# EAGLE board opengeiger_board (EAGLE 6.5.0)
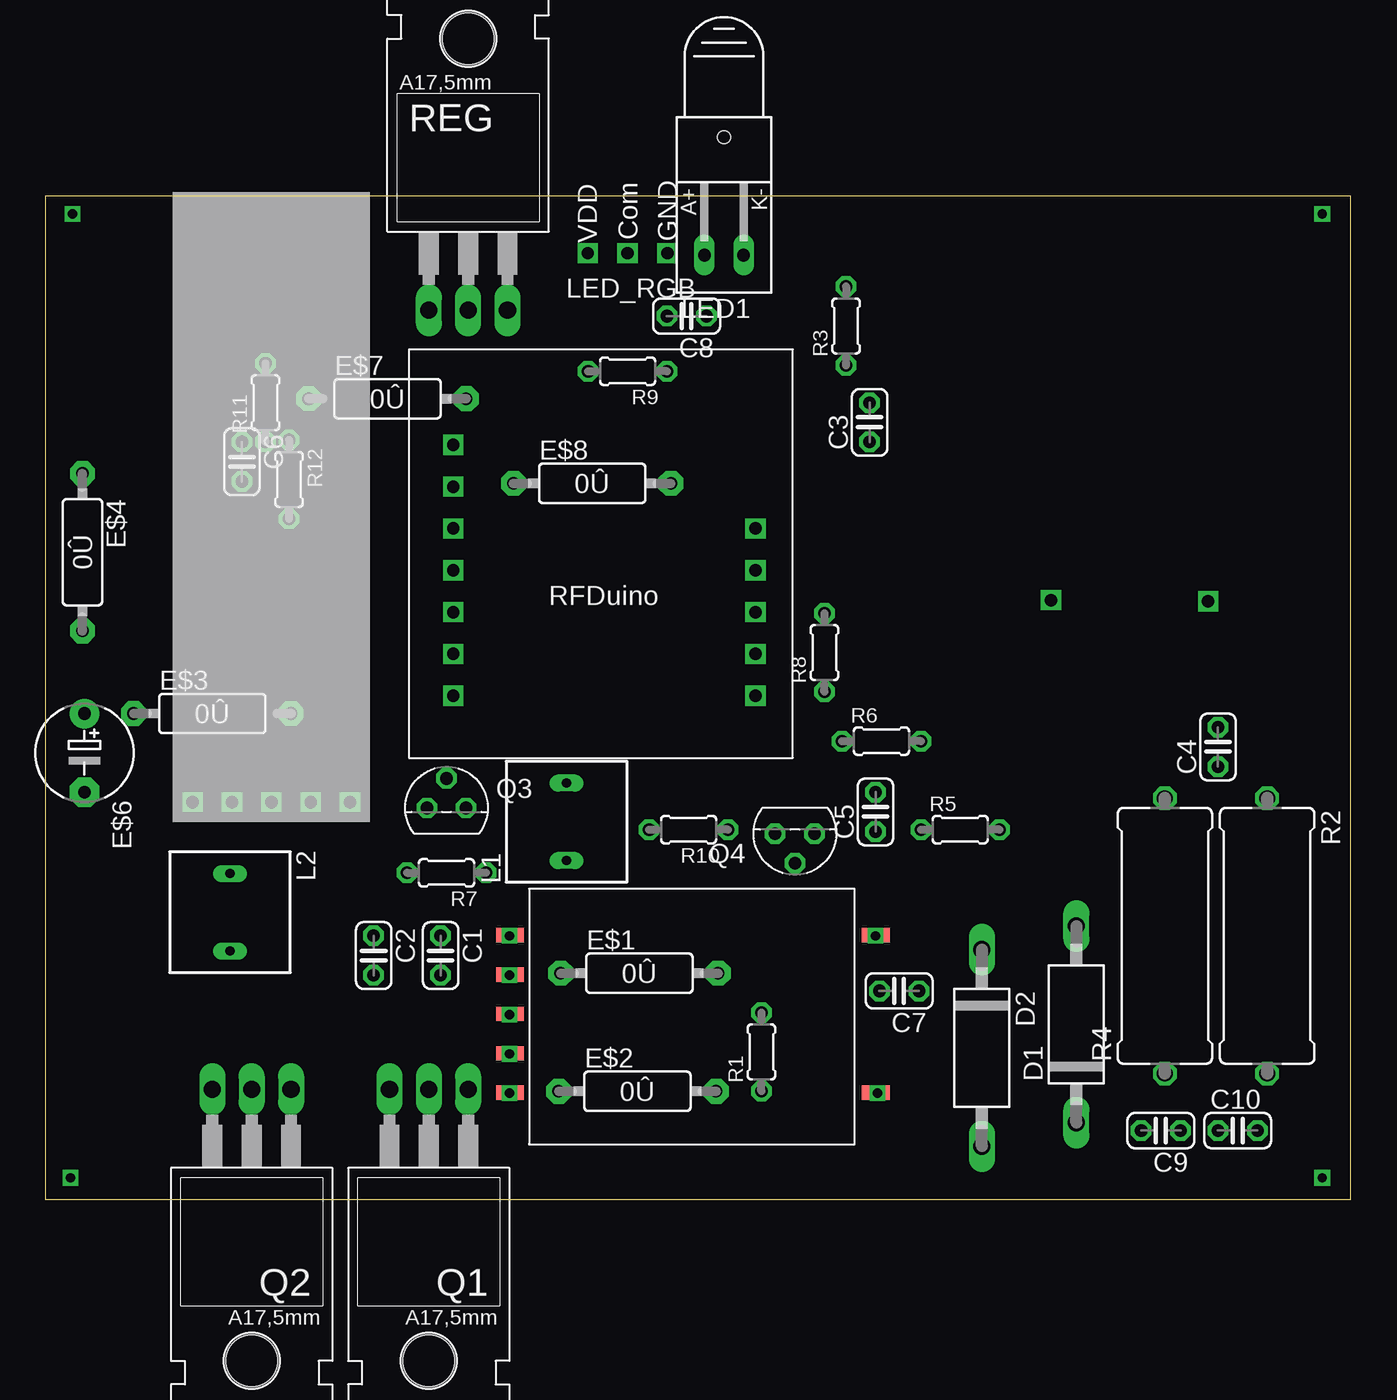
[diagram p0: board, top side]
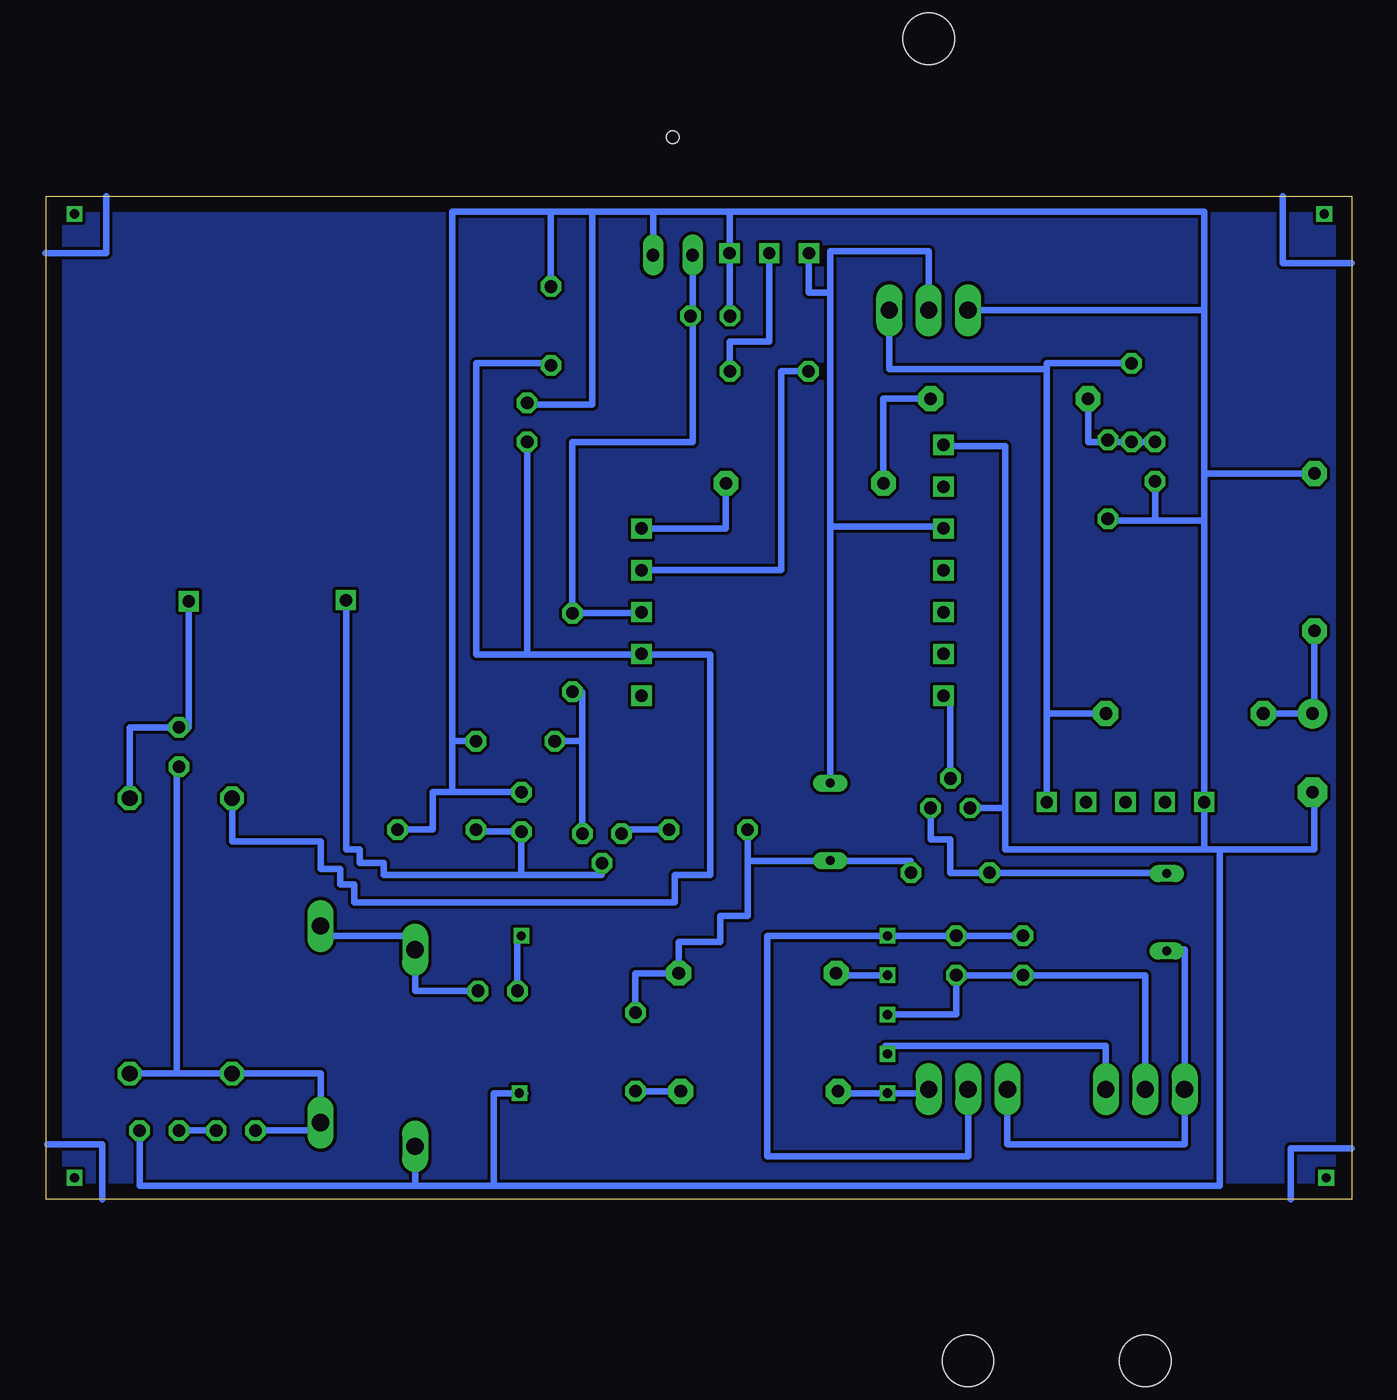
[diagram p1: board, bottom side, seen from below]

Size 84.25 x 64.76 mm. Coordinates in mm from the lower left corner, seen from the top.
Outline: 0,0 84.25,0 84.25,64.76 0,64.76 0,0
Copper layers (1*16): Top 0.035mm / dielectric 1.5mm / Bottom 0.035mm
Design rules "default": minimum track width 10mil, minimum drill 24mil, track to track 8mil, track to pad 8mil, pad to pad 8mil, via to via 8mil, smd to smd 8mil, copper to edge 40mil, drill to drill 8mil, minimum pad ring 10mil, minimum via ring 8mil, stop-mask expansion 4mil, vias tented up to drill 0mil, thermal gap 10mil

## Footprints (pad centres in the part's own frame; a part is rotated, then mirrored left to right if it is on the bottom)
C025-024X044 = drill 0.813 octagon: 1 -1.27,0; 2 1.27,0
DO15-12 = drill 1.118 long: A 6.35,0; C -6.35,0
0R/10 = drill 0.813 pad 1.6 octagon: 1 -5.08,0; 2 5.08,0
E5-6 = drill 0.813 pad 1.905: + -2.54,0 | drill 0.813 pad 1.905 octagon: - 2.54,0
SD8 = drill 0.6 long: 1 -2.5,0; 2 2.5,0
Q62902-B155 = drill 0.813 long: A 7.62,-1.27; K 7.62,1.27 | hole 0.813: 0,0
TO220 = drill 1.118 long: 1 -2.54,-6.35; 2 0,-6.35; 3 2.54,-6.35 | hole 3.302: 0,11.176
TO92 = drill 0.813 octagon: 1 1.27,0; 2 0,1.905; 3 -1.27,0
0204/5 = drill 0.813 octagon: 1 -2.54,0; 2 2.54,0
0617/17 = drill 1.016 octagon: 1 -8.89,0; 2 8.89,0
CCFL_TRANSFO = smd 1.778 x 0.914: P$1 -1.238,13.5; P$2 -1.238,10.96; P$3 -1.238,8.42; P$4 -1.238,5.88; P$5 -1.238,3.34; P$6 22.365,3.34; P$10 22.365,13.5
RFDUINO = drill 0.8 square: +3V 2.85,-11.55; FACTORY 2.85,-16.95; GND 2.85,-6.15; GPIO0/AREF 2.85,-19.65; GPIO1 2.85,-22.35; GPIO2 22.35,-22.35; GPIO3 22.35,-19.65; GPIO4 22.35,-16.95; GPIO5 22.35,-14.25; GPIO6 22.35,-11.55; P2 2.85,-8.85; RESET 2.85,-14.25
TUBE = drill 0.8 square: P$1 0,0; P$2 10.14,-0.08
LED_RGB = drill 0.8 square: COM 0,0; GND 0,2.57; VDD 0,-2.57
CHARGEUR = drill 0.8 square: P$1 0,0; P$2 0,-2.54; P$3 0,-5.08; P$4 0,-7.62; P$5 0,-10.16

## Placement (x,y rotation side)
C1  100n  [C025-024X044]  25.53,15.75 270 top
C2  100n  [C025-024X044]  21.21,15.75 270 top
C3  100n  [C025-024X044]  53.21,50.17 90 top
C4  10n  [C025-024X044]  75.69,29.21 90 top
C5  100n  [C025-024X044]  53.59,25.02 90 top
C6  100n  [C025-024X044]  12.7,47.62 270 top
C7  47n  [C025-024X044]  55.12,13.46 180 top
C8  100n  [C025-024X044]  41.4,57.02 180 top
C9  47n  [C025-024X044]  72.01,4.45 180 top
C10  100n  [C025-024X044]  76.96,4.45 0 top
D1  1N5060GP  [DO15-12]  66.55,11.3 90 top
D2  1N5060GP  [DO15-12]  60.45,9.78 270 top
E$1  [0R/10]  38.35,14.61 0 top
E$2  [0R/10]  38.23,6.98 0 top
E$3  [0R/10]  10.8,31.37 0 top
E$4  [0R/10]  2.41,41.78 270 top
E$6  [E5-6]  2.54,28.83 270 top
E$7  [0R/10]  22.1,51.69 0 top
E$8  [0R/10]  35.31,46.23 0 top
L1  100u  [SD8]  33.66,24.38 90 top
L2  100u  [SD8]  11.94,18.54 270 top
LED1  [Q62902-B155]  43.81,68.58 270 top
Q1  BU505  [TO220]  24.77,0.76 180 top
Q2  BU505  [TO220]  13.34,0.76 180 top
Q3  BC337  [TO92]  25.91,25.27 0 top
Q4  BC337  [TO92]  48.39,23.62 180 top
R1  330  [0204/5]  46.23,9.53 90 top
R2  4.7M  [0617/17]  78.87,17.02 270 top
R3  27k  [0204/5]  51.69,56.39 90 top
R4  4.7M  [0617/17]  72.26,17.02 90 top
R5  490k  [0204/5]  59.06,23.88 0 top
R6  10k  [0204/5]  53.98,29.59 0 top
R7  1k  [0204/5]  25.91,21.08 180 top
R8  330  [0204/5]  50.29,35.31 90 top
R9  1k  [0204/5]  37.59,53.47 180 top
R10  330  [0204/5]  41.53,23.88 180 top
R11  10k  [0204/5]  14.22,51.44 90 top
R12  33k  [0204/5]  15.75,46.48 270 top
REG  [TO220]  27.3,63.75 0 top
U$1  CCFL_TRANSFO  [CCFL_TRANSFO]  31.24,3.56 0 top
U$2  RFDUINO  [RFDUINO]  23.5,54.86 0 top
U$3  TUBE  [TUBE]  75.06,38.61 180 top
U$4  LED_RBG  [LED_RGB]  37.59,61.09 270 top
U$5  CHARGEUR  [CHARGEUR]  9.53,25.65 90 top

## Library data of the parts
C1-C10 E$6 R1-R12 = rcl
D1 D2 = diode
E$1-E$4 E$7 E$8 = jumper
L1 L2 = inductor-neosid; OC_FARNELL: unknown; OC_NEWARK: unknown
LED1 = led
Q1-Q4 REG = transistor
U$1-U$5 = CCFL

## Nets
N$1: Q1.3 Q2.3
N$2: C3.2 C5.2 C8.2 C10.2 E$4.1 LED1.K Q3.3 R5.2 R6.2 REG.1 U$5.P$1
N$5: Q3.2
N$6: C1.2 C2.2
N$8: C9.2 D1.C R2.2 R4.1
N$9: Q2.1
N$11: R9.2
N$13: R10.1
N$14: C5.1 Q4.2 R5.1
N$15: Q4.3 R8.1
N$17: E$3.2 R11.2 REG.3 U$5.P$5
N$18: C3.1 R3.1
N$19: LED1.A R8.2
N$20: Q3.1 R7.2
N$21: Q1.2
S$1: E$2.1
S$2: E$1.1
S$3: L2.1
S$4: U$1.P$6
S$5: E$2.2 R1.1
S$6: R6.1
S$7: L1.1
S$8: C4.2 U$3.P$1
S$10: C7.2
S$11: C7.1
S$13: U$4.VDD
S$14: R9.1
S$26: C6.1
S$27: E$7.2
VDD: REG.2
VDD_BOBINE: E$1.2 R7.1 R10.2

## Tracks (layer width: path | path; a pad name or v marks a point on that pad's centre or on a via)
N$1
  Bottom 0.406: Q1.3 22.23,3.56 10.8,3.56 Q2.3 10.8,16.13 12.57,16.13
N$2  (via drill 0.6)
  Bottom 0.406: 9.53,43.81 U$5.P$1 9.53,22.61 | 9.53,43.81 9.53,46.86 | 9.53,46.86 9.53,57.4 | 9.53,57.4 REG.1 | 22.35,25.27 22.35,48.64 26.42,48.64 | 22.35,25.27 22.35,22.61 9.53,22.61 | 49.02,63.75 45.09,63.75 | 45.09,63.75 40.13,63.75 | 40.13,63.75 9.53,63.75 9.53,57.4 | Q3.3 22.35,25.27 | 8.51,22.61 8.51,0.89 55.37,0.89 | 9.53,22.61 8.51,22.61 | 55.37,0.89 60.45,0.89 | 53.34,6.86 v53.72,6.86 55.37,6.86 55.37,0.89 | 49.02,63.75 49.02,51.31 53.21,51.31 C3.2 | 60.45,0.89 60.45,4.32 | 49.02,63.75 51.69,63.75 | 51.69,63.75 51.69,58.8 | 51.69,63.75 58.04,63.75 58.04,29.59 | 58.04,29.59 58.04,26.29 | 58.04,26.29 C5.2 53.59,26.16 | 58.04,26.29 59.31,26.29 59.31,23.88 R5.2 | R6.2 58.04,29.59 | 8.51,22.61 2.41,22.61 2.41,26.29 | E$4.1 9.53,46.86 | 60.45,0.89 78.23,0.89 C10.2 | C8.2 40.13,63.75 | LED1.K 45.09,63.75 | 12.7,46.48 12.7,43.81 | 12.7,43.81 15.75,43.81 15.75,44.07 | 12.7,43.81 9.53,43.81
N$5
  Bottom 0.406: Q3.2 25.91,32.51 26.29,32.51
N$6  (via drill 0.6)
  Bottom 0.406: 30.1,11.94 v29.97,11.94 25.53,11.94 C1.2 C2.2 13.34,14.48 13.34,6.98
N$8
  Bottom 0.406: 75.82,8.13 R4.1 66.55,8.13 D1.C 66.55,4.45 C9.2 | 75.82,8.13 R2.2 | 75.82,27.94 75.82,8.13
N$9
  Bottom 0.406: Q2.1 15.88,9.91 30.1,9.91 30.1,9.4
N$11
  Bottom 0.406: 45.85,40.64 36.83,40.64 36.83,53.47 R9.2
N$12
  Bottom 0.406: 64.39,19.18 64.39,20.32 65.28,20.32 65.28,21.34 66.55,21.34 66.55,23.11 72.26,23.11 72.26,26.04
N$13
  Bottom 0.406: R10.1 47.12,23.88 47.12,23.49
N$14
  Bottom 0.406: 53.59,20.95 48.39,20.95 Q4.2 | 53.59,20.95 C5.1 56.52,23.75 R5.1 | 53.59,20.95 62.48,20.95 62.48,21.72 64.01,21.72 64.01,22.61 64.9,22.61 64.9,38.61
N$15
  Bottom 0.406: R8.1 49.66,32.77 49.66,29.59 | 49.66,29.59 Q4.3 | 51.56,29.59 49.66,29.59
N$17
  Bottom 0.406: U$5.P$5 19.69,31.37 | 19.69,31.37 19.69,53.47 19.69,53.59 | 19.69,53.59 29.84,53.59 REG.3 | E$3.2 19.69,31.37 | R11.2 19.69,53.97 19.69,53.59
N$18
  Bottom 0.406: 53.21,35.18 41.4,35.18 41.4,20.95 43.69,20.95 43.69,19.18 64.26,19.18 | 53.21,35.18 C3.1 | 53.21,35.18 56.52,35.18 56.52,53.97 51.69,53.97 R3.1
N$19
  Bottom 0.406: 45.85,37.85 R8.2 50.29,48.9 42.55,48.9 LED1.A
N$20
  Bottom 0.406: 11.94,21.08 R7.2 25.91,21.08 25.91,23.24 27.18,23.24 Q3.1
N$21  (via drill 0.6)
  Bottom 0.406: 21.08,17.02 v29.97,17.02 37.72,17.02 37.72,2.79 24.77,2.79 Q1.2
S$1  (via drill 0.6)
  Bottom 0.406: 27.3,6.86 v29.97,6.86 33.15,6.86 E$2.1
S$2  (via drill 0.6)
  Bottom 0.406: v29.97,14.48 33.27,14.48 E$1.1
S$5
  Bottom 0.406: E$2.2 R1.1
S$8
  Bottom 0.406: 78.87,25.78 78.87,30.48 75.82,30.48 C4.2 75.06,30.48 75.06,30.61 75.06,30.86 U$3.P$1
S$9
  Bottom 0.406: 5.71,31.37 2.41,31.37 2.41,36.7
S$10  (via drill 0.6)
  Bottom 0.406: C7.2 53.85,17.02 v53.59,17.02 53.34,17.02
S$11
  Bottom 0.406: C7.1 60.45,13.46 60.45,17.02 66.42,17.02
S$12
  Bottom 0.406: 73.15,4.45 75.82,4.45
S$14
  Bottom 0.406: R9.1 40.13,55.37 37.59,55.37 37.59,61.09
S$15  (via drill 0.6)
  other vias: 29.97,9.4
S$17  (via drill 0.6)
  other vias: 1.78,63.63
S$18
  Bottom 0.406: 0,60.45 4.44,60.45 4.44,64.77
S$19  (via drill 0.6)
  other vias: 82.42,1.4
S$20  (via drill 0.6)
  other vias: 1.65,1.4
S$21  (via drill 0.6)
  other vias: 82.42,63.63
S$22
  Bottom 0.406: 0,3.3 3.94,3.3 3.94,0
S$23
  Bottom 0.406: 84.2,3.56 80.64,3.56 80.64,0
S$24
  Bottom 0.406: 84.33,61.09 80.39,61.09 80.39,64.77
S$25
  pour Bottom: 0,64.77 84.2,64.77 84.2,0 0,0
S$26
  Bottom 0.406: C6.1 15.75,48.9 15.88,48.9 17.02,48.9 17.02,51.82
S$27
  Bottom 0.406: E$7.2 30.23,51.69 30.23,46.1
S$28
  Bottom 0.406: 45.85,43.31 40.39,43.31 40.39,46.36
VDD
  Bottom 0.406: REG.2 27.3,61.21 33.66,61.21 33.66,58.55 | 33.66,58.55 33.66,43.43 | 33.66,43.43 26.04,43.43 | 33.66,43.43 33.66,26.92 | 33.66,58.55 35.05,58.55 35.05,61.09
VDD_BOBINE
  Bottom 0.406: R7.1 28.45,21.84 38.99,21.84 | R10.2 38.99,21.84 | 38.99,21.84 38.99,18.29 40.77,18.29 40.77,16.64 43.43,16.64 E$1.2 46.23,14.61 46.23,11.94